# Altium PCB Atmel AVR consumer electronics control board.PcbDoc (part 3 of 4)
Units mm, origin at the board's own origin, x right, y up, seen from the top; angles counter-clockwise.
Board outline 310.13 x 89.13 mm, 2 copper layers (Top Layer, Top, Bottom Layer, Bottom); 455 components, 162 nets, 940 pads, 0 vias.
Unrouted connection lines stored in the file: 21.
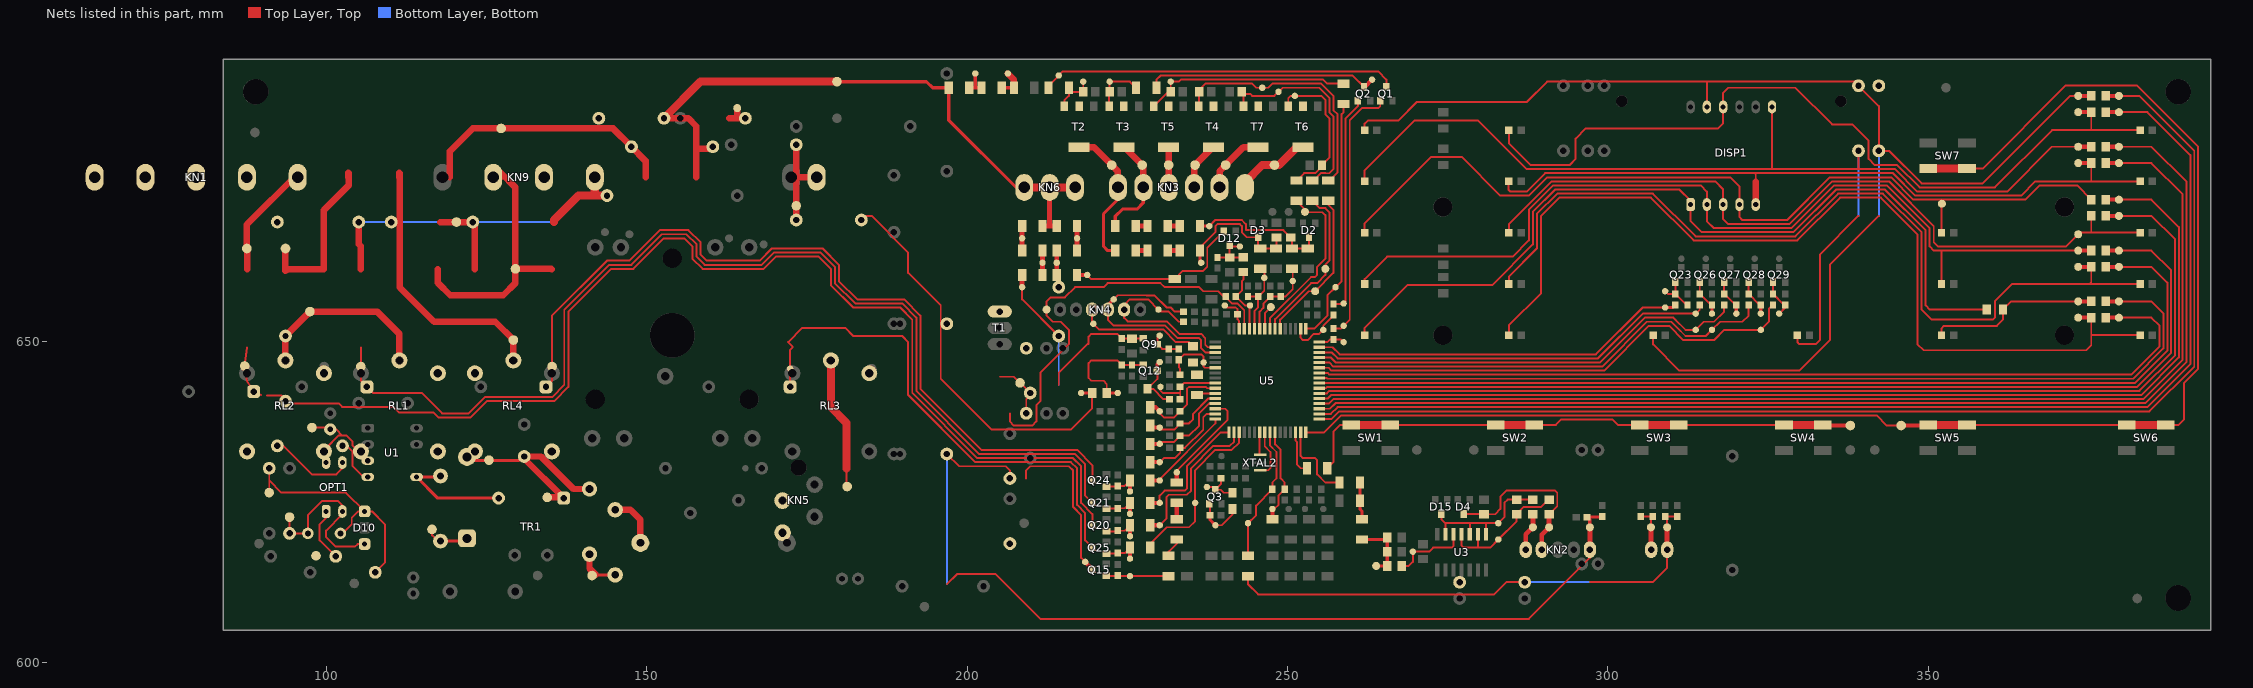
[diagram p3: the nets of this part, all layers, seen from the top]

## Nets (pads, with @x,y where several pads share a name; then routed paths per layer and width w, separated by ;. In a path a pad name is that pad's centre, name@x,y a point inside that pad or via, vN(x,y) a via of type N, cw(c..) or ccw(c..) an arc to the next point about the centre after c; other vN are vias at no path point) (continued)
BUTTON_3: C61.2 R172.1 TP46.1 U5.26 | length 15.1
  Top Layer, Top w0.292: TP46.1@247.65,623.887 247.968,623.887 248.602,624.522 248.602,626.008 C61.2@249.555,626.96 249.555,628.015 248.92,628.65 248.92,633.095 248.06,633.955 U5.26@248.06,635.823
  Top Layer, Top w0.635: R172.1@247.65,622.3 TP46.1@247.65,623.887
BUTTON_MUX0: J25.1 J25.2 SW1.1 SW1.3 SW2.1 SW2.3 SW3.1 SW3.3 SW4.1 SW4.3 TP37.1 U5.30 | length 96.2
  Top Layer, Top w0.292: U5.30@251.26,635.823 251.26,634.565 251.46,634.365 251.46,630.872 252.095,630.237 J25.1@253.047,630.237
  Top Layer, Top w0.305: J25.2@256.222,630.237 257.175,631.19 257.175,635.952 258.223,637 SW1.1@259.975,637 ; SW1.3@266.025,637 SW2.1@282.475,637 ; SW2.3@288.525,637 291.878,637 292.735,637.857 300.673,637.857 301.53,637 SW3.1@304.975,637 ; SW3.3@311.025,637 SW4.1@327.475,637
  Top Layer, Top w0.635: 332.105,637 332.2,636.905 TP37.1@337.82,636.905
  Top Layer, Top w1.27: SW1.1@259.975,637 SW1.3@266.025,637 ; SW2.1@282.475,637 SW2.3@288.525,637 ; SW3.1@304.975,637 SW3.3@311.025,637 ; SW4.1@327.475,637 332.105,637 SW4.3@333.525,637
BUTTON_MUX1: SW5.1 SW5.3 SW6.1 SW6.3 SW7.1 SW7.3 TP38.1 U5.32 | length 234.4
  Top Layer, Top w0.292: U5.32@252.86,635.823 255.712,635.823 258.382,638.492 341.947,638.492 343.535,636.905 TP38.1@345.757,636.905
  Top Layer, Top w0.3: 382.587,689.928 392.08,680.435 392.08,645.763 389.89,643.572
  Top Layer, Top w0.305: SW5.3@356.025,637 SW6.1@380.975,637 ; SW7.1@356.025,677 358.457,677 371.385,689.928 382.587,689.928 ; SW6.3@387.025,637 389.033,637 389.89,637.857 389.89,643.572
  Top Layer, Top w0.635: TP38.1@345.757,636.905 349.88,636.905 SW5.1@349.975,637
  Top Layer, Top w1.27: SW7.3@349.625,677 SW7.3@349.975,677 SW7.1@356.025,677 ; SW5.1@349.975,637 SW5.3@356.025,637 ; SW6.1@380.975,637 SW6.3@387.025,637
D/L_TRIAC_CONTROL: C10.1 C50.1 R103.2 TP109.1 U5.59 | length 11.8
  Top Layer, Top w0.292: C10.1@243.84,657.01 C50.1@245.427,657.01 246.38,657.962 TP109.1@246.38,659.956
  Top Layer, Top w0.305: U5.59@244.86,652.023 244.86,654.816 245.427,655.384 C50.1@245.427,657.01 ; R103.2@245.745,661.352 246.38,660.717 TP109.1@246.38,659.956
DOORLOCK: KN3.5 R136.1 T2.2 T2.4 TP113.1 | length 22.4
  Top Layer, Top w0.508: R136.1@223.139,664.21 221.933,664.21 221.297,664.845 221.297,669.925 223.555,672.183 KN3.5@223.555,674.053
  Top Layer, Top w1.016: T2.4@217.487,680.353 219.76,680.353 TP113.1@222.567,677.545 223.555,676.557 KN3.5@223.555,674.053
DOORLOCK_M: R1.1 TP165.1 U5.48 | length 4.2
  Top Layer, Top w0.292: U5.48@254.96,649.923 256.222,649.923 256.642,650.342 R1.1@257.175,650.342
  Top Layer, Top w0.305: R1.1@257.175,650.342 258.343,650.342 TP165.1@258.762,649.923
FLOWM_1: C48.2 R111.2 TP20.1 U5.25 | length 21.5
  Top Layer, Top w0.292: 245.11,623.252 245.11,624.42 C48.2@247.65,626.96 247.65,628.015 248.285,628.65 248.285,632.777 247.26,633.802 U5.25@247.26,635.823
  Top Layer, Top w0.305: R111.2@243.84,616.585 TP20.1@243.84,621.665 245.11,622.935 245.11,623.252
HEATER: R169.2 TP131.1 U5.19 | length 27.2
  Top Layer, Top w0.292: 231.14,621.03 234.632,621.03 235.585,621.982 TP131.1@235.585,624.84 235.585,629.92 238.76,633.095 241.3,633.095 242.46,634.255
  Top Layer, Top w0.305: R169.2@228.6,617.855 228.6,618.49 231.14,621.03 ; 242.46,634.255 U5.19@242.46,635.823
HEATER_P: KN5.a2 KN5.b2 RL3.1 TP134.1 | length 20.7
  Top Layer, Top w0.305: 181.213,630.198 181.213,627.46 TP134.1@181.292,627.38
  Top Layer, Top w1.27: RL3.1@178.752,647.065 178.752,639.762 181.213,637.302 181.213,630.198
HOT_WATER: KN3.1 T7.2 T7.4 TP140.1 | length 10.1
  Top Layer, Top w1.016: KN3.1@239.395,674.053 239.395,676.592 TP140.1@240.347,677.545 243.155,680.353 T7.4@245.427,680.353
JET_POMPASI: pad.0@243.355,674.053 T6.2 T6.4 TP7.1 | length 12.1
  Top Layer, Top w1.27: pad.0@243.355,674.053 243.355,674.837 246.062,677.545 TP7.1@247.968,677.545 248.652,677.545 251.46,680.353 T6.4@252.412,680.353
JET_PUMP/JTAG_TMS: R43.2 TP3.1 U5.56 | length 27.3
  Top Layer, Top w0.292: U5.56@247.26,652.023 247.26,653.66 253.682,660.082 254.317,660.082 254.635,660.4 254.635,661.67 255.905,662.94 255.905,669.735 255.46,670.179 252.793,670.179 TP3.1@252.73,670.242
  Top Layer, Top w0.305: R43.2@251.397,671.957 252.73,670.623 TP3.1@252.73,670.242
JTAG_TCK: TP4.1 U5.57 | length 3.7
  Top Layer, Top w0.305: U5.57@246.46,652.023 246.46,654.447 TP4.1@247.396,655.384
K_FLOWM_1: C47.2 J28.1 J28.2 KN7.1 R110.2 R111.1 TP21.1 | length 79.1
  Top Layer, Top w0.305: R111.1@243.84,613.41 243.84,612.14 245.427,610.553 282.257,610.553 284.162,612.457 J28.1@287.02,612.457 ; 297.18,612.457 307.022,612.457 309.245,614.68 KN7.1@309.245,617.538 ; TP21.1@309.245,621.03 309.245,622.402 R110.2@308.928,622.72 C47.2@310.832,622.72
  Top Layer, Top w0.762: KN7.1@309.245,617.538 TP21.1@309.245,621.03
  Bottom Layer, Bottom w0.305: J28.1@287.02,612.457 297.18,612.457
K_FLOWM_2: C53.2 KN7.2 R112.1 TP23.1 | length 7.2
  Top Layer, Top w0.305: R112.1@305.118,622.72 C53.2@307.022,622.72 306.705,622.402 TP23.1@306.705,621.03
  Top Layer, Top w0.762: TP23.1@306.705,621.03 306.745,620.99 KN7.2@306.745,617.538
K_SU_SEVIYE_1: D4.3 KN2.4 R35.1 R39.1 TP151.1 | length 27.4
  Top Layer, Top w0.292: R39.1@290.83,623.062 292.1,624.332 292.1,626.428 291.782,626.745 291.465,626.745
  Top Layer, Top w0.305: D4.3@277.495,623.105 280.713,623.105 R35.1@280.67,623.062 282.385,623.062 283.21,623.887 283.21,625.793 284.162,626.745 291.465,626.745
  Top Layer, Top w0.762: KN2.4@289.68,617.538 289.68,619.88 TP151.1@290.83,621.03 R39.1@290.83,623.062
K_SU_SEVIYE_2: KN2.5 R41.1 TP154.1 | length 6
  Top Layer, Top w0.762: KN2.5@287.18,617.538 287.18,619.92 TP154.1@288.29,621.03 R41.1@288.29,623.062
LINE_LEVEL: C34.1 R98.2 TP121.1 U5.60 | length 10.7
  Top Layer, Top w0.292: C34.1@241.935,657.01 242.887,657.962 242.887,659.447 243.103,659.663 ; 243.347,655.652 243.361,655.637
  Top Layer, Top w0.305: C34.1@241.935,657.01 241.989,657.01 243.347,655.652 ; 243.103,659.663 R98.2@243.103,660.857 ; 243.361,655.637 TP121.1@244.06,655.637 ; U5.60@244.06,652.023 TP121.1@244.06,655.637 ; TP121.1@244.157,655.637 TP121.1@244.06,655.637
MAINWASH: KN3.3 T5.2 T5.4 TP137.1 | length 6.3
  Top Layer, Top w1.016: T5.4@231.457,680.353 TP137.1@231.457,677.545 231.457,674.07 KN3.3@231.475,674.053
MOTOR_DIRECTION_1: R166.2 TP106.1 U5.16 | length 14.7
  Top Layer, Top w0.292: TP106.1@230.06,628.332 230.06,628.523 238.76,637.222 U5.16@238.76,637.923
  Top Layer, Top w0.635: R166.2@228.6,628.332 TP106.1@230.06,628.332
MOTOR_DIRECTION_2: R146.2 TP100.1 U5.17 | length 19.5
  Top Layer, Top w0.292: TP100.1@230.06,624.84 230.06,625.983 230.822,626.745 233.998,626.745 234.315,627.062 234.315,628.015
  Top Layer, Top w0.305: 234.315,628.015 234.315,630.555 239.583,635.823 U5.17@240.86,635.823
  Top Layer, Top w0.635: R146.2@228.6,624.84 TP100.1@230.06,624.84
MOTOR_PHASE_CONTROL: J9.1 J9.2 R116.2 TP80.1 U5.14 | length 19
  Top Layer, Top w0.292: TP80.1@232.727,629.602 232.727,629.856 240.665,637.794 240.665,639.127 240.27,639.523 U5.14@238.76,639.523
  Top Layer, Top w0.635: R116.2@232.727,622.3 J9.1@232.727,624.84 ; J9.2@232.727,628.015 TP80.1@232.727,629.602
MOTOR_YUKSEK_HIZ: R145.2 TP103.1 U5.18 | length 23.9
  Top Layer, Top w0.292: TP103.1@230.06,621.347 231.14,622.427 231.14,625.793 231.457,626.11 234.315,626.11 234.95,626.745
  Top Layer, Top w0.305: 234.95,626.745 234.95,630.237 238.442,633.73 240.982,633.73 241.66,634.407 U5.18@241.66,635.823
  Top Layer, Top w0.635: R145.2@228.6,621.347 TP103.1@230.06,621.347
MSUTUN_1: R31.1 TP65.1 U5.33 | length 190.9
  Top Layer, Top w0.3: 382.905,688.34 391.48,679.765 391.48,646.115 384.493,639.127
  Top Layer, Top w0.305: U5.33@254.96,637.923 256.859,637.923 258.064,639.127 384.493,639.127 ; TP65.1@379.73,688.34 382.905,688.34
  Top Layer, Top w0.635: R31.1@377.698,688.34 TP65.1@379.73,688.34
MSUTUN_2: R20.1 TP63.1 U5.35 | length 181.9
  Top Layer, Top w0.3: 383.857,640.397 390.28,646.82 390.28,674.933 384.81,680.402
  Top Layer, Top w0.305: U5.35@254.96,639.523 254.643,639.523 256.618,639.523 257.493,640.397 383.857,640.397 ; TP63.1@379.73,680.402 384.81,680.402
  Top Layer, Top w0.635: R20.1@377.698,680.402 TP63.1@379.73,680.402
MSUTUN_3: R24.1 TP61.1 U5.37 | length 170.3
  Top Layer, Top w0.3: 383.222,641.668 389.08,647.525 389.08,667.878 384.81,672.147
  Top Layer, Top w0.305: U5.37@254.96,641.122 256.312,641.122 256.858,641.668 383.222,641.668 ; TP61.1@379.73,672.147 384.81,672.147
  Top Layer, Top w0.635: R24.1@377.698,672.147 TP61.1@379.73,672.147
MSUTUN_4: R5.1 TP59.1 U5.39 | length 159.6
  Top Layer, Top w0.3: 382.587,642.938 387.88,648.23 387.88,661.14 384.81,664.21
  Top Layer, Top w0.305: U5.39@254.96,642.722 256.007,642.722 256.222,642.938 382.587,642.938 ; TP59.1@379.73,664.21 384.81,664.21
  Top Layer, Top w0.635: R5.1@377.698,664.21 TP59.1@379.73,664.21
MSUTUN_5: R36.1 TP57.1 U5.41 | length 148.9
  Top Layer, Top w0.3: 381.952,644.207 386.68,648.935 386.68,654.403 384.81,656.272
  Top Layer, Top w0.305: U5.41@254.96,644.323 256.107,644.323 256.222,644.207 381.952,644.207 ; TP57.1@379.73,656.272 384.81,656.272
  Top Layer, Top w0.635: R36.1@377.698,656.272 TP57.1@379.73,656.272
MSUTUN_6: R17.1 TP55.1 U5.34 | length 187.7
  Top Layer, Top w0.3: 384.175,639.762 390.88,646.468 390.88,679.095 384.175,685.8
  Top Layer, Top w0.305: U5.34@254.96,638.722 256.77,638.722 257.81,639.762 384.175,639.762 ; TP55.1@379.73,685.8 384.175,685.8
  Top Layer, Top w0.635: R17.1@377.698,685.8 TP55.1@379.73,685.8
MSUTUN_7: R16.1 TP53.1 U5.36 | length 178
  Top Layer, Top w0.3: 383.54,641.033 389.68,647.173 389.68,672.992 384.81,677.862
  Top Layer, Top w0.305: U5.36@254.96,640.322 254.643,640.323 256.465,640.323 257.175,641.033 383.54,641.033 ; TP53.1@379.73,677.862 384.81,677.862
  Top Layer, Top w0.635: R16.1@377.698,677.862 TP53.1@379.73,677.862
MSUTUN_8: R12.1 TP51.1 U5.38 | length 166.3
  Top Layer, Top w0.3: 382.905,642.303 388.48,647.878 388.48,665.937 384.81,669.607
  Top Layer, Top w0.305: U5.38@254.96,641.923 255.277,641.923 256.16,641.923 256.54,642.303 382.905,642.303 ; TP51.1@379.73,669.607 384.81,669.607
  Top Layer, Top w0.635: R12.1@377.698,669.607 TP51.1@379.73,669.607
MSUTUN_9: R3.1 TP49.1 U5.40 | length 155.6
  Top Layer, Top w0.3: 382.27,643.572 387.28,648.583 387.28,659.2 384.81,661.67
  Top Layer, Top w0.305: U5.40@254.96,643.523 255.855,643.523 255.905,643.572 382.27,643.572 ; TP49.1@379.73,661.67 384.81,661.67
  Top Layer, Top w0.635: R3.1@377.698,661.67 TP49.1@379.73,661.67
MSUTUN_10: R15.1 TP47.1 U5.42 | length 145.8
  Top Layer, Top w0.3: 381.635,644.842 386.08,649.288 386.08,652.462 384.81,653.732
  Top Layer, Top w0.305: U5.42@254.96,645.122 254.643,645.123 256.26,645.123 256.54,644.842 381.635,644.842 ; TP47.1@379.73,653.732 384.81,653.732
  Top Layer, Top w0.635: R15.1@377.698,653.732 TP47.1@379.73,653.732
NET00000: R127.1 R128.2 | length 1.8
  Top Layer, Top w0.762: R128.2@231.331,668.02 R127.1@233.172,668.02
NET00001: R14.2 U1.4 | length 7.3
  Top Layer, Top w0.3: R14.2@102.552,633.73 103.188,633.73 104.14,632.777 104.14,630.555 105.815,628.88 U1.4@106.5,628.88
NET00002: Q1.3 R21.2 TP119.1 | length 55.6
  Top Layer, Top w0.292: 222.567,692.15 229.87,692.15
  Top Layer, Top w0.305: R21.2@212.725,689.61 212.725,689.928 TP119.1@214.312,691.515 214.947,692.15 222.567,692.15 ; 229.87,692.15 264.16,692.15 265.43,690.88 Q1.3@265.43,689.758
NET00003: C6.1 TP164.1 U5.62 | length 5.4
  Top Layer, Top w0.292: TP164.1@240.22,655.637 240.538,655.32 241.935,655.32 242.214,655.041 C6.1@242.214,654.24 242.214,653.454 242.46,653.207 U5.62@242.46,652.023
NET00004: R19.1 R46.2 TP86.1 | length 4.1
  Top Layer, Top w1.016: 162.877,684.847 164.147,684.847 ; TP86.1@164.147,686.435 164.147,684.847 ; R19.1@165.417,684.847 164.147,684.847
NET00005: Q1.1 R1.2 TP166.1 | length 40.7
  Top Layer, Top w0.292: 259.715,654.583 259.715,684.53 261.62,686.435 264.16,686.435 264.48,686.755 Q1.1@264.48,687.557
  Top Layer, Top w0.305: R1.2@257.175,652.043 258.343,652.043 TP166.1@258.762,652.462 259.715,653.415 259.715,654.583
NET00006: R128.1 R129.2 | length 1.8
  Top Layer, Top w0.762: R129.2@226.314,668.02 R128.1@228.155,668.02
NET00007: Q9.3 R96.1 R102.1 TP115.1 | length 5.1
  Top Layer, Top w0.292: TP115.1@230.06,650.938 229.7,650.578 Q9.3@229.7,649.605 230.437,648.868 R102.1@231.457,648.868 R96.1@233.045,648.868
NET00008: R113.1 R130.2 TP124.1 | length 3.8
  Top Layer, Top w0.762: R113.1@213.995,660.4 TP124.1@213.995,662.305 R130.2@213.995,664.21
NET00009: U5.24 XTAL2.1 | length 7.7
  Top Layer, Top w0.292: XTAL2.1@245.745,629.92 247.015,629.92 247.332,630.237 247.332,632.777 246.46,633.65 U5.24@246.46,635.823
NET00010: R130.1 R131.2 TP125.1 | length 3.8
  Top Layer, Top w0.762: R130.1@217.17,664.21 TP125.1@217.17,666.115 R131.2@217.17,668.02
NET00011: U5.23 XTAL2.3 | length 3.5
  Top Layer, Top w0.292: U5.23@245.66,635.823 245.66,632.405 XTAL2.3@245.745,632.32
NET00012: C32.1 D27.2 Q12.1 R67.2 R70.1 TP97.1 | length 17.7
  Top Layer, Top w0.292: R70.1@221.805,641.985 221.805,643.382 221.297,643.89 219.392,643.89 218.963,644.32 D27.2@218.963,645.477 218.963,646.635 219.392,647.065 223.418,647.065 R67.2@224.155,646.328
  Top Layer, Top w0.305: R67.2@224.155,646.328 C32.1@225.742,646.328 227.4,646.328 Q12.1@227.5,646.428
  Top Layer, Top w0.508: R70.1@221.805,641.985 TP97.1@223.52,641.985
NET00014: D5.2 D7.1 TP11.1 | length 7.3
  Top Layer, Top w0.5: TP11.1@141.5,613.5 141.6,613.6 142.1,613.6 D7.1@145.1,613.6
  Top Layer, Top w1: D5.2@141.1,616.84 141.1,614.6 TP11.1@142.1,613.6
NET00015: R34.1 R80.1 T3.3 TP145.1 | length 8.4
  Top Layer, Top w0.292: T3.3@222.172,686.752 222.172,688.895 R80.1@222.252,688.975
  Top Layer, Top w0.305: R80.1@222.252,688.975 222.252,690.56 TP145.1@222.25,690.562 225.425,690.562 R34.1@226.377,689.61
NET00016: R124.1 R125.2 TP126.1 | length 4.5
  Top Layer, Top w0.508: R125.2@205.422,689.61 R124.1@207.327,689.61
  Top Layer, Top w1: TP126.1@206.375,691.832 207.327,690.88 R124.1@207.327,689.61
NET00017: R125.1 R126.2 TP127.1 | length 4.1
  Top Layer, Top w0.508: R126.2@200.343,689.61 201.295,689.61 ; TP127.1@201.295,691.832 201.295,689.61 ; R125.1@202.248,689.61 201.295,689.61
NET00019: R117.1 R132.2 TP117.1 | length 3.8
  Top Layer, Top w0.762: R117.1@211.772,660.4 TP117.1@211.772,662.305 R132.2@211.772,664.21
NET00020: R132.1 R133.2 TP118.1 | length 3.8
  Top Layer, Top w0.762: R132.1@208.597,664.21 TP118.1@208.597,666.115 R133.2@208.597,668.02
NET00021: R121.1 R135.2 | length 1.8
  Top Layer, Top w0.762: R135.2@231.331,664.21 R121.1@233.172,664.21
NET00022: R135.1 R136.2 | length 1.8
  Top Layer, Top w0.762: R136.2@226.314,664.21 R135.1@228.155,664.21
NET00024: R100.1 R115.1 T1.3 TP84.1 | length 9.3
  Top Layer, Top w0.292: 205.105,644.525 207.327,644.525 TP84.1@208.28,643.572 R100.1@209.867,641.985 209.867,641.668 209.232,641.033 R115.1@209.232,638.81
NET00025: R21.1 R50.1 T2.3 TP120.1 | length 7
  Top Layer, Top w0.292: TP120.1@218.123,690.562 218.125,690.56 R50.1@218.125,688.975
  Top Layer, Top w0.305: T2.3@215.187,686.752 215.187,687.627 215.9,688.34 R21.1@215.9,688.975 ; R21.1@215.9,689.61 R21.1@215.9,688.975 ; R50.1@218.125,688.975 R21.1@215.9,688.975
NET00027: D12.2 R113.2 R137.2 TP123.1 | length 28
  Top Layer, Top w0.292: R137.2@232.41,659.765 233.68,661.035 236.855,661.035 237.49,661.67 237.49,664.673 D12.2@240.032,667.215
  Top Layer, Top w0.305: TP123.1@218.757,660.4 219.392,659.765 R137.2@232.41,659.765
  Top Layer, Top w0.635: R113.2@217.17,660.4 TP123.1@218.757,660.4
NET00028: D31.1 Q20.3 RL2.2 TP105.1 | length 190.8
  Top Layer, Top w0.305: 87.662,649.065 87.63,649.032 TP105.1@87.3,646.2 87.63,643.89 D31.1@88.7,642.2 89.852,641.668 ; 90.772,641.571 93.02,641.566 94.902,640.366 101.949,640.366 102.505,639.81 110.5,639.81 111.405,638.905 116.77,638.905 117.5,638.175 122.555,638.175 125.095,640.715 135.572,640.715 137.795,642.938 137.795,654.685 144.463,661.352 147.955,661.352 152.718,666.115 155.892,666.115 157.162,664.845 157.162,662.94 158.75,661.352 168.275,661.352 170.18,663.257 176.847,663.257 178.752,661.352 178.752,658.812 182.245,655.32 189.547,655.32 191.452,653.415 191.452,641.985 201.612,631.825 216.535,631.825 217.805,630.555 217.805,624.84 219.562,623.083 Q20.3@219.562,621.347
NET00029: D6.2 TR1.2 U1.5 | length 17.9
  Top Layer, Top w0.5: D6.2@117.856,629.031 117.705,628.88 U1.5@114.12,628.88 117.416,625.584 TR1.2@126.906,625.584
NET00030: Q2.1 R2.2 TP148.1 | length 34.2
  Top Layer, Top w0.292: R2.2@257.175,655.853 258.66,655.853 TP148.1@258.762,655.955 259.08,656.272 259.08,684.847 260.987,686.755 Q2.1@260.987,687.557
NET00031: Q26.1 R149.2 R171.1 TP70.1 | length 5.8
  Top Layer, Top w0.305: Q26.1@314.327,659.3 314.327,657.44 R171.1@314.325,657.44 316.025,655.74 R149.2@316.23,655.74
  Top Layer, Top w0.508: TP70.1@316.23,654.367 R149.2@316.23,655.74
NET00032: D2.3 R66.2 R82.1 R97.1 R127.2 TP149.1 | length 22.5
  Top Layer, Top w0.292: 238.76,668.972 242.887,668.972 243.522,668.337 243.522,667.385 249.364,667.385 R66.2@250.507,666.242
  Top Layer, Top w0.305: TP149.1@237.807,668.02 238.76,668.972 ; R66.2@250.507,666.242 250.698,666.051 R97.1@250.698,664.527 R82.1@253.174,664.527 253.365,664.527 D2.3@253.365,666.285
  Top Layer, Top w0.508: R127.2@236.347,668.02 TP149.1@237.807,668.02
NET00033: Q2.3 R34.2 TP160.1 | length 36.4
  Top Layer, Top w0.292: 230.188,691.515 260.032,691.515
  Top Layer, Top w0.305: R34.2@229.552,689.61 229.552,690.88 230.188,691.515 ; 260.032,691.515 260.18,691.515 Q2.3@261.938,689.758
  Top Layer, Top w0.635: Q2.3@261.938,689.758 262.085,689.758 TP160.1@263.207,690.88
NET00034: C35.1 D12.3 R98.1 R101.2 TP122.1 | length 7.5
  Top Layer, Top w0.305: R101.2@239.077,663.155 C35.1@240.982,663.155 ; D12.3@240.982,665.015 D12.3@240.982,664.845 ; TP122.1@242.57,664.845 D12.3@240.982,664.845 ; R98.1@243.103,663.143 243.103,663.13 C35.1@240.982,663.13 C35.1@240.982,663.155 ; C35.1@240.982,663.155 D12.3@240.982,664.845
NET00035: Q15.3 R115.2 TP83.1 | length 27.6
  Top Layer, Top w0.292: TP83.1@218.44,615.632 218.44,615.498 Q15.3@219.537,614.401
  Top Layer, Top w0.305: 209.232,628.65 209.232,629.92 209.867,630.555 215.9,630.555 216.535,629.92 216.535,624.205 217.805,622.935 217.805,616.267 TP83.1@218.44,615.632
  Top Layer, Top w0.635: TP83.1@218.44,615.632 219.562,614.51 219.537,614.485 Q15.3@219.537,614.401
NET00036: C11.1 D10.1 R6.2 R7.1 TP168.1 | length 38.3
  Top Layer, Top w0.3: TP168.1@91.123,626.428 91.123,628.332 ; R7.1@91.123,630.237 91.123,628.332 ; C11.1@102.5,620 104,621.5 104,622.5 105,623.5 D10.1@106,623.5 ; R6.2@107.66,614 109.16,615.5 109.16,621.5 107.16,623.5 D10.1@106,623.5 ; 91.123,628.332 93.027,626.428 103.072,626.428 D10.1@106,623.5
NET00037: C2.2 D5.1 D8.2 TP22.1 TP81.1 TR1.1 | length 34
  Top Layer, Top w0.3: TP81.1@124.777,631.444 124.841,631.507 TP81.1@125.412,631.507
  Top Layer, Top w0.5: D8.2@121.983,632.015 122.555,631.444 124.777,631.444 130.112,631.444 130.738,632.07 C2.2@130.909,632.07 C2.2@130.779,632.2
  Top Layer, Top w1: TP22.1@134.5,625.7 TR1.1@136.95,625.7 ; TR1.1@137.066,625.584 TR1.1@136.95,625.7 ; D5.1@141.1,627 138.6,627 133.53,632.07 C2.2@130.909,632.07 130.909,631.741 TR1.1@136.95,625.7
NET00038: J44.1 J44.2 Q15.1 R116.1 R134.1 TP82.1 | length 12.9
  Top Layer, Top w0.292: Q15.1@221.737,613.451 223.458,613.451 R134.1@223.52,613.512
  Top Layer, Top w0.305: R134.1@223.52,613.512 223.622,613.41 TP82.1@225.425,613.41 J44.1@231.457,613.41 ; J44.2@231.457,616.585 231.457,617.22 232.727,618.49 R116.1@232.727,619.125
NET00039: Q27.1 R150.2 R173.1 TP72.1 | length 5.8
  Top Layer, Top w0.305: Q27.1@318.137,659.3 318.137,657.44 R173.1@318.135,657.44 319.835,655.74 R150.2@320.04,655.74
  Top Layer, Top w0.508: TP72.1@320.04,654.367 R150.2@320.04,655.74
NET00040: Q3.3 R10.1 R55.1 TP159.1 | length 6.5
  Top Layer, Top w0.292: R55.1@239.61,628.65 239.61,627.743 Q3.3@238.76,626.893 239.565,626.893 240.03,626.428 R10.1@241.427,626.428
  Top Layer, Top w0.305: TP159.1@237.427,627.317 238.336,627.317 Q3.3@238.76,626.893
NET00041: D6.1 D8.1 TP24.1 | length 7
  Top Layer, Top w0.3: TP24.1@116.522,620.712 116.522,619.76 117.411,618.871 D6.1@117.856,618.871
  Top Layer, Top w0.5: D6.1@117.856,618.871 121.539,618.871 D8.1@121.983,619.315
NET00043: Q21.1 R146.1 R165.2 TP101.1 | length 5.8
  Top Layer, Top w0.292: R165.2@223.52,623.99 224.575,623.99 R146.1@225.425,624.84
  Top Layer, Top w0.305: Q21.1@221.763,623.89 221.863,623.99 R165.2@223.52,623.99
  Top Layer, Top w0.635: TP101.1@225.425,623.125 R146.1@225.425,624.84
NET00045: D33.1 Q21.3 RL1.2 TP102.1 | length 171
  Top Layer, Top w0.305: 105.442,649.065 105.442,646.145 TP102.1@105.41,646.112 105.41,643.89 D33.1@106.362,642.938 107.315,641.985 114.935,641.985 118.11,638.81 122.237,638.81 124.777,641.35 135.255,641.35 137.16,643.255 137.16,655.002 144.145,661.987 147.637,661.987 152.4,666.75 156.21,666.75 157.797,665.163 157.797,663.257 159.067,661.987 167.957,661.987 169.862,663.892 177.165,663.892 179.387,661.67 179.387,659.13 182.562,655.955 189.865,655.955 192.088,653.732 192.088,642.303 201.93,632.46 216.852,632.46 218.44,630.872 218.44,625.962 Q21.3@219.562,624.84
NET00046: R43.1 R86.1 T6.3 TP142.1 | length 23.4
  Top Layer, Top w0.292: T6.3@250.112,686.752 250.112,687.945 250.507,688.34 TP142.1@251.142,688.34 251.7,688.34 ; 255.905,685.482 256.54,684.847 256.54,678.688
  Top Layer, Top w0.305: R43.1@251.397,675.132 251.46,675.132 252.603,676.275 254.317,676.275 255.395,677.352 R86.1@255.395,677.545 256.538,678.688 256.54,678.688 ; 251.7,688.34 255.27,688.34 255.905,687.705 255.905,685.482
NET00047: D15.3 R38.1 R41.2 TP153.1 U3.8 U3.10 U3.13 | length 23.3
  Top Layer, Top w0.305: D15.3@274.002,623.105 274.002,622.3 274.637,621.665 ; U3.13@274.637,619.95 274.637,621.665 ; U3.10@278.447,619.95 278.447,621.665 ; U3.8@280.988,619.95 280.988,621.665 ; R41.2@288.29,625.348 R38.1@285.75,625.348 284.353,625.348 283.845,624.84 283.845,622.617 TP153.1@282.892,621.665 280.988,621.665 ; 274.637,621.665 278.447,621.665 ; 278.447,621.665 280.988,621.665
NET00048: R42.1 TP155.1 U3.12 | length 12.1
  Top Layer, Top w0.292: R42.1@267.843,614.997 268.923,614.997 269.558,615.632 TP155.1@269.558,617.22
  Top Layer, Top w0.305: TP155.1@269.558,617.22 272.097,617.22 272.733,617.855 275.59,617.855 275.907,618.173 U3.12@275.907,619.95
NET00049: Q28.1 R151.2 R175.1 TP74.1 | length 5.8
  Top Layer, Top w0.305: Q28.1@321.947,659.3 321.947,657.44 R175.1@321.945,657.44 323.645,655.74 R151.2@323.85,655.74
  Top Layer, Top w0.508: TP74.1@323.85,654.367 R151.2@323.85,655.74
NET00050: R73.2 R74.1 T5.3 TP136.1 | length 32.5
  Top Layer, Top w0.292: T5.3@229.157,686.752 231.38,688.975 R74.1@231.777,688.975 231.777,690.56 TP136.1@231.775,690.562 233.045,690.562 233.362,690.88 255.587,690.88 256.222,690.245 R73.2@258.762,690.245
NET00052: Q24.1 R166.1 R167.2 TP107.1 | length 5.8
  Top Layer, Top w0.305: Q24.1@221.763,627.382 223.42,627.382 R167.2@223.52,627.482 224.575,627.482 R166.1@225.425,628.332
  Top Layer, Top w0.635: TP107.1@225.425,626.618 R166.1@225.425,628.332
NET00053: Q3.1 R8.2 R11.1 TP158.1 | length 7.9
  Top Layer, Top w0.292: Q3.1@237.81,624.692 237.91,624.592 R11.1@237.91,622.935 ; TP158.1@238.76,621.347 239.712,621.347 241.427,623.062 R8.2@241.427,623.887
  Top Layer, Top w0.508: R11.1@237.91,622.935 237.91,622.198 TP158.1@238.76,621.347
NET00054: OPT1.3 R14.1 | length 13.5
  Top Layer, Top w0.3: R14.1@92.392,633.73 93.345,633.73 97.79,629.285 101.6,629.285 102.54,630.225 OPT1.3@102.54,631.12
  Top Layer, Top w0.5: OPT1.3@102.54,631.12 OPT1.3@102.749,631.12
NET00055: R38.2 R39.2 TP152.1 U3.9 U3.11 | length 21.4
  Top Layer, Top w0.305: U3.11@277.178,619.95 277.178,618.173 277.495,617.855 279.717,617.855 ; U3.9@279.717,619.95 279.717,617.855 ; R39.2@290.83,625.348 290.703,625.348 289.56,624.205 286.893,624.205 R38.2@285.75,623.062 285.75,621.982 TP152.1@282.892,619.125 281.623,617.855 279.717,617.855
NET00056: JM3.1 RL1.1 RL2.1 TP90.1 | length 28.7
  Top Layer, Top w1.016: RL2.1@93.662,647.065 JM3.1@93.662,650.875 TP90.1@97.472,654.685 107.95,654.685 111.442,651.192 RL1.1@111.442,647.065
NET00059: C1.2 OPT1.4 TP111.1 U1.3 | length 16.8
  Top Layer, Top w0.3: TP111.1@97.79,636.587 100.37,636.587 C1.2@100.647,636.31 101.56,636.31 102.552,635.317 ; OPT1.4@100,631.12 100,632 100,633.4 101.917,635.317 102.552,635.317 ; 104.14,634.365 103.188,635.317 102.552,635.317
  Top Layer, Top w0.305: 104.14,634.365 104.14,633.78 U1.3@106.5,631.42
NET00063: Q29.1 R177.1 R179.2 TP76.1 | length 6.2
  Top Layer, Top w0.305: Q29.1@325.757,659.3 325.757,657.44 R177.1@325.755,657.44 327.455,655.74 R179.2@327.66,655.74 327.66,655.32 TP76.1@326.707,654.367
NET00064: C11.2 D10.3 OPT1.2 R9.1 TP167.1 | length 27.7
  Top Layer, Top w0.3: TP167.1@94.297,622.617 R9.1@94.297,620.077 C11.2@97.155,620.077 ; OPT1.2@102.54,624.46 OPT1.2@102.54,623.5 102.54,623.04 100,620.5 100,619.5 101.5,618 104.5,618 104.92,618.42 D10.3@106,618.42
  Top Layer, Top w0.305: C11.2@97.155,620.077 97.155,622.935 99.377,625.158 101.842,625.158 OPT1.2@102.54,624.46
NET00066: D35.1 Q24.3 RL4.5 TP108.1 | length 129.8
  Top Layer, Top w0.305: D35.1@134.302,642.938 135.223,643.858 TP108.1@135.223,646.112 ; TP108.1@135.255,646.112 TP108.1@135.223,646.112 ; Q24.3@219.562,628.332 219.562,630.703 217.17,633.095 202.248,633.095 192.722,642.62 192.722,654.05 190.183,656.59 182.88,656.59 180.022,659.447 180.022,661.987 177.482,664.527 169.545,664.527 167.64,662.622 159.385,662.622 158.433,663.575 158.433,665.48 156.528,667.385 152.082,667.385 147.32,662.622 143.827,662.622 135.223,654.018 TP108.1@135.223,646.112
NET00070: Q12.3 R53.1 R56.1 TP96.1 | length 9
  Top Layer, Top w0.292: 228.917,642.62 R56.1@228.155,642.62 229.7,644.165 Q12.3@229.7,645.477
  Top Layer, Top w0.305: 228.917,642.62 229.044,642.62 230.632,641.033 R53.1@231.56,641.033
  Top Layer, Top w0.508: Q12.3@229.7,645.477 229.7,646.451 TP96.1@230.06,646.811
NET00071: D7.2 R23.2 | length 8.2
  Top Layer, Top w1: D7.2@145.1,623.76 147.48,623.76 149.04,622.2 R23.2@149.04,618.6
NET00072: OPT1.1 R4.1 TP144.1 | length 8.4
  Top Layer, Top w0.3: OPT1.1@100,623.5 100,622.5 99,621.5 99,619 R4.1@101.5,616.5
NET00074: R68.1 R70.2 TP98.1 | length 64.3
  Top Layer, Top w0.305: R68.1@183.515,668.972 183.515,669.29 183.832,669.607 185.102,669.607 190.817,663.892 190.817,660.717 195.897,655.637 195.897,644.207 203.835,636.27 216.218,636.27 219.519,639.572 R70.2@219.519,641.985
  Top Layer, Top w0.508: TP98.1@217.805,641.985 R70.2@219.519,641.985
NET00076: R81.1 R91.2 T7.3 TP139.1 | length 32.5
  Top Layer, Top w0.292: R81.1@242.885,688.975 R81.1@243.127,688.733 ; T7.3@243.127,686.752 R81.1@243.127,688.733 ; 255.905,676.275 256.54,676.275 257.175,676.91 257.175,685.165 256.54,685.8 256.54,688.022 254.952,689.61 249.237,689.61 TP139.1@248.602,688.975 247.968,688.34 244.475,688.34 244.157,688.658 243.203,688.658 R81.1@243.127,688.733
  Top Layer, Top w0.305: R91.2@253.873,675.132 254.063,675.132 255.206,676.275 255.905,676.275
NET00077: C33.1 D9.1 J37.1 J37.2 Q9.1 R117.2 R120.1 TP116.1 | length 38.2
  Top Layer, Top w0.292: 214.312,643.255 214.312,645.16 218.757,649.605 ; 219.392,651.192 223.418,651.192
  Top Layer, Top w0.305: TP116.1@208.597,658.495 208.597,656.59 J37.1@214.312,650.875 ; 218.757,649.605 D9.1@218.963,649.605 218.963,650.763 219.392,651.192 ; 223.418,651.192 C33.1@224.155,650.455 R120.1@225.742,650.455 ; R120.1@225.742,650.43 R120.1@225.742,650.455 ; Q9.1@227.5,650.555 227.5,650.455 R120.1@225.742,650.455
  Top Layer, Top w0.762: TP116.1@208.597,658.495 R117.2@208.597,660.4
  Bottom Layer, Bottom w0.305: 214.312,643.255 J37.1@214.312,650.875
NET00082: R61.2 R62.1 T4.3 TP129.1 | length 39.4
  Top Layer, Top w0.292: T4.3@236.142,686.752 236.222,686.832 R62.1@236.222,688.975 236.222,689.295 237.172,690.245 244.475,690.245 245.11,689.61 TP129.1@246.062,689.61 247.015,689.61 247.65,690.245 255.27,690.245
  Top Layer, Top w0.305: 255.27,690.245 257.175,688.34 257.175,686.117 257.81,685.482 257.81,676.402 256.54,675.132 R61.2@256.349,675.132
NET00092: D3.3 R84.2 R85.1 R103.1 R121.2 TP110.1 | length 21.3
  Top Layer, Top w0.292: R121.2@236.347,664.21 236.347,664.654 238.76,667.067 238.76,668.02 239.077,668.337 242.57,668.337 242.887,668.02 242.887,667.067 243.205,666.75
  Top Layer, Top w0.305: 243.205,666.75 243.67,666.285 D3.3@245.427,666.285 245.427,664.527 R103.1@245.745,664.527 R85.1@248.221,664.527 248.285,664.527 R84.2@248.285,666.242
  Top Layer, Top w0.508: R121.2@236.347,664.21 236.347,662.495 TP110.1@236.537,662.305
NET00095: Q25.1 R168.2 R169.1 TP132.1 | length 5.8
  Top Layer, Top w0.292: R168.2@223.52,617.005 224.575,617.005 R169.1@225.425,617.855
  Top Layer, Top w0.305: Q25.1@221.763,616.905 223.42,616.905 R168.2@223.52,617.005
  Top Layer, Top w0.635: TP132.1@225.425,616.14 R169.1@225.425,617.855
NET00096: D34.1 Q25.3 RL3.2 TP133.1 | length 80.7
  Top Layer, Top w0.305: D34.1@172.403,642.938 TP133.1@172.403,645.795 172.403,648.715 172.752,649.065 172.752,649.255 172.085,649.923 174.308,652.145 180.975,652.145 182.245,650.875 189.865,650.875 190.817,649.923 190.817,641.668 201.295,631.19 216.218,631.19 217.17,630.237 217.17,624.522 218.44,623.252 218.44,618.977 Q25.3@219.562,617.855
NET00122: Q23.1 R148.2 R152.1 TP68.1 | length 6.2
  Top Layer, Top w0.292: TP68.1@308.928,657.86 309.347,657.44 R152.1@310.515,657.44 310.517,657.443 Q23.1@310.517,659.3
  Top Layer, Top w0.305: R152.1@310.515,657.44 312.215,655.74 R148.2@312.42,655.74
NET00126: Q20.1 R144.2 R145.1 TP104.1 | length 5.8
  Top Layer, Top w0.292: R144.2@223.52,620.497 224.575,620.497 R145.1@225.425,621.347
  Top Layer, Top w0.305: Q20.1@221.763,620.397 223.42,620.397 R144.2@223.52,620.497
  Top Layer, Top w0.635: TP104.1@225.425,619.633 R145.1@225.425,621.347
NTC: C15.2 R27.2 TP26.1 U5.61 | length 65.7
  Top Layer, Top w0.292: 210.82,640.08 211.455,640.715 211.455,645.16 215.9,649.605 215.9,651.827 214.63,653.097 213.36,653.097 212.407,654.05 TP26.1@212.407,655.002 212.407,656.272 213.042,656.908 215.265,656.908 216.852,658.495 ; 221.933,659.13 230.188,659.13 230.822,658.495 236.22,658.495 236.855,657.86 239.204,657.86 ; C15.2@240.347,657.01 240.347,656.908 241.3,655.955 242.189,655.955 243.26,654.884 U5.61@243.26,652.023
  Top Layer, Top w0.305: 206.692,638.81 206.692,637.54 207.327,636.905 210.185,636.905 210.82,637.54 210.82,640.08 ; 216.852,658.495 221.297,658.495 221.933,659.13 ; 239.204,657.86 240.055,657.01 C15.2@240.347,657.01
NTC_K1: C13.1 J20.1 J20.2 KN2.1 R26.1 R27.1 TP25.1 | length 149.2
  Top Layer, Top w0.305: 196.85,612.14 198.438,613.727 204.47,613.727 211.455,606.742 287.655,606.742 297.18,616.267 KN2.1@297.18,617.538 ; J20.1@196.85,632.46 198.755,630.555 206.058,630.555 206.692,629.92 R27.1@206.692,628.65
  Top Layer, Top w0.508: TP25.1@297.18,621.03 297.18,622.198 C13.1@296.76,622.617 298.983,622.617 R26.1@299.085,622.72
  Top Layer, Top w0.762: KN2.1@297.18,617.538 TP25.1@297.18,621.03
  Bottom Layer, Bottom w0.305: 196.85,612.14 J20.1@196.85,632.46
P: J53.1 J53.2 J55.1 J55.2 JM1.2 KN9.1 RL1.3 RL4.3 TP88.1 | length 58.7
  Top Layer, Top w1.016: J53.1@105.093,668.655 105.093,665.195 105.442,664.845 105.442,661.265 ; 117.792,668.655 TP88.1@120.332,668.655 J55.1@122.872,668.655 123.19,668.655 123.222,668.623 123.222,661.265
  Top Layer, Top w1.27: 135.572,668.655 135.572,668.972 139.382,672.783 141.922,672.783 ; KN9.1@141.922,675.64 141.922,672.783 ; JM1.2@143.827,672.783 141.922,672.783
  Bottom Layer, Bottom w0.305: J53.1@105.093,668.655 J55.2@110.172,668.655 117.792,668.655 ; J55.1@122.872,668.655 135.572,668.655
PHASE: JM2.1 KN6.1 KN6.2 KN6.3 KN9.3 R46.1 R126.1 R131.1 R133.1 TP87.1 | length 100.9
  Top Layer, Top w0.508: TP87.1@179.705,690.562 193.675,690.562 194.627,689.61 R126.1@197.167,689.61 197.167,684.53 207.645,674.053 KN6.3@208.933,674.053
  Top Layer, Top w0.762: R133.1@211.772,668.02 213.042,668.02 ; KN6.2@212.893,674.053 212.893,668.17 213.042,668.02 ; R131.1@213.995,668.02 213.042,668.02
  Top Layer, Top w1.016: R46.1@152.718,684.847 156.528,684.847 157.762,683.613 157.762,680.085 ; 157.762,675.64 157.762,680.085 ; JM2.1@160.338,680.402 160.02,680.085 157.762,680.085
  Top Layer, Top w1.27: R46.1@152.718,684.847 158.433,690.562 TP87.1@179.705,690.562 ; KN6.3@208.933,674.053 KN6.2@212.893,674.053 KN6.1@216.852,674.053
PREWASH: KN3.2 T4.2 T4.4 TP130.1 | length 7.6
  Top Layer, Top w1.016: KN3.2@235.435,674.053 235.435,677.395 TP130.1@235.585,677.545 238.393,680.353 T4.4@238.442,680.353
PUMP: R2.1 TP147.1 U5.50 | length 8.7
  Top Layer, Top w0.292: U5.50@252.06,652.023 252.06,650.593 252.412,650.24 253.174,650.24 254.127,651.192 254.952,651.192 TP147.1@255.587,651.827 255.587,652.462 257.175,654.05 R2.1@257.175,654.152
PUMP_CONTROL: C8.1 C49.1 R97.2 TP150.1 U5.58 | length 12.9
  Top Layer, Top w0.292: 246.253,655.637 246.253,655.93 C8.1@247.332,657.01 C49.1@248.92,657.01 249.657,657.01 250.825,658.178 TP150.1@250.825,659.447
  Top Layer, Top w0.305: U5.58@245.66,652.023 245.66,654.663 246.253,655.256 246.253,655.637 ; R97.2@250.698,661.352 250.825,661.226 TP150.1@250.825,659.447
ROTARY_1: C54.2 R109.2 TP28.1 U5.10 | length 14.5
  Top Layer, Top w0.292: TP28.1@230.06,639.127 230.06,638.81 230.695,638.175 232.308,638.175 C54.2@233.26,639.127 234.315,640.182 234.315,642.62 234.632,642.938 237.275,642.938 237.49,642.722 U5.10@238.76,642.722
  Top Layer, Top w0.635: R109.2@228.6,639.762 229.425,639.762 TP28.1@230.06,639.127
ROTARY_2: C57.2 R158.2 TP32.1 U5.12 | length 13
  Top Layer, Top w0.292: TP32.1@230.06,636.587 230.378,636.27 232.308,636.27 C57.2@233.26,637.222
  Top Layer, Top w0.305: C57.2@233.26,637.222 234.632,637.222 235.267,637.857 235.267,638.746 237.643,641.122 U5.12@238.76,641.122
  Top Layer, Top w0.635: R158.2@228.6,636.905 228.917,636.587 TP32.1@230.06,636.587
ROTARY_3: C60.2 R164.2 TP30.1 U5.13 | length 13.9
  Top Layer, Top w0.292: TP30.1@230.06,634.048 230.378,634.365 232.308,634.365 C60.2@233.26,635.317
  Top Layer, Top w0.305: C60.2@233.26,635.317 234.632,635.317 236.22,636.905 236.22,638.81 237.732,640.322 U5.13@238.76,640.322
  Top Layer, Top w0.635: R164.2@228.6,634.048 TP30.1@230.06,634.048
ROTARY_4: C58.2 R160.2 TP34.1 U5.15 | length 14.8
  Top Layer, Top w0.292: TP34.1@230.06,631.19 230.695,631.825 232.41,631.825 233.26,632.675 C58.2@233.26,633.413
  Top Layer, Top w0.305: C58.2@233.26,633.413 233.998,633.413 236.855,636.27 236.855,638.175 237.402,638.722 U5.15@238.76,638.722
  Top Layer, Top w0.635: R160.2@228.6,631.19 TP34.1@230.06,631.19
ROTOR: KN1.5 RL1.4 RL4.4 TP89.1 | length 40.4
  Top Layer, Top w1.016: 117.443,661.265 117.443,659.162 119.38,657.225 127.635,657.225 129.54,659.13 TP89.1@129.54,661.352 ; 127.248,675.64 127.248,676.345 129.54,674.053 TP89.1@129.54,661.352 ; 135.223,661.265 135.135,661.352 TP89.1@129.54,661.352
RX: KN4.2 R18.2 TP162.1 U5.2 | length 29.8
  Top Layer, Top w0.292: 233.362,651.192 233.108,651.192 231.14,653.161 225.044,653.161 224.512,653.693 KN4.2@224.512,655.002 224.512,655.677 225.425,656.59 228.282,656.59 TP162.1@229.87,655.002 230.188,654.685 231.457,654.685 233.045,653.097 R18.2@233.782,653.097
  Top Layer, Top w0.305: 233.362,651.192 236.537,651.192 237.172,650.558 237.172,649.523 237.572,649.122 U5.2@238.76,649.122
SATIR_0: R152.2 TP67.1 U5.47 | length 59.2
  Top Layer, Top w0.305: U5.47@254.96,649.122 257.023,649.122 258.127,648.017 298.132,648.017 305.435,655.32 TP67.1@308.928,655.32
  Top Layer, Top w0.508: TP67.1@308.928,655.32 310.095,655.32 R152.2@310.515,655.74
SATIR_1: R171.2 TP69.1 U5.46 | length 63.6
  Top Layer, Top w0.292: 305.435,654.367 TP69.1@313.69,654.367 314.325,655.002 R171.2@314.325,655.74
  Top Layer, Top w0.305: U5.46@254.96,648.323 256.87,648.323 257.81,647.382 298.45,647.382 305.435,654.368
SATIR_2: R173.2 TP71.1 U5.45 | length 69.4
  Top Layer, Top w0.292: 310.515,653.415 312.102,651.827 TP71.1@313.69,651.827 314.96,653.097 316.548,653.097 318.135,654.685 R173.2@318.135,655.74
  Top Layer, Top w0.305: U5.45@254.96,647.522 256.718,647.522 257.493,646.747 298.767,646.747 305.753,653.733 310.197,653.732 310.515,653.415
SATIR_3: R175.2 TP73.1 U5.44 | length 74.1
  Top Layer, Top w0.292: 310.515,652.462 310.832,652.145 312.102,650.875 315.277,650.875
  Top Layer, Top w0.305: U5.44@254.96,646.722 256.565,646.723 257.175,646.112 299.085,646.112 306.07,653.098 309.88,653.098 310.515,652.462 ; 315.277,650.875 TP73.1@316.23,651.827 317.5,653.097 320.993,653.097 321.945,654.05 R175.2@321.945,655.74
SATIR_4: R177.2 TP75.1 U5.43 | length 78.2
  Top Layer, Top w0.305: U5.43@254.96,645.923 256.412,645.923 256.858,645.477 299.402,645.477 306.387,652.462 309.562,652.462 311.785,650.24 316.548,650.24 318.135,651.827 TP75.1@323.85,651.827 325.12,653.097 325.12,655.105 R177.2@325.755,655.74
SCK: J16.1 J16.2 J33.1 J33.2 KN4.4 TP138.1 U5.11 | length 22.3
  Top Layer, Top w0.305: KN4.4@219.512,655.002 219.512,652.978 TP138.1@219.71,652.78 220.567,651.923 220.687,651.923 230.6,651.923 232.6,649.923 234.632,649.923 J33.1@235.267,649.288 ; J16.2@235.903,641.668 236.158,641.923 U5.11@238.76,641.923
STATOR_COM: KN1.3 RL4.1 TP93.1 | length 43
  Top Layer, Top w1.016: 111.407,675.64 111.407,676.345 111.478,676.275 111.478,658.46 116.84,653.097 126.403,653.097 129.222,650.278 TP93.1@129.222,650.24 RL4.1@129.222,647.065
STATOR_HIGH_SPEED: KN1.1 RL2.3 TP91.1 | length 19.1
  Top Layer, Top w1.016: 87.662,661.265 87.662,664.495 TP91.1@87.63,664.527 87.63,668.268 KN1.1@95.567,676.205 ; KN1.1@95.567,675.64 KN1.1@95.567,676.205 ; KN1.1@95.567,676.205 95.567,676.345 95.637,676.275 KN1.1@95.567,676.205
STATOR_LOW_SPEED: JM3.2 KN1.2 RL2.4 TP92.1 | length 27
  Top Layer, Top w1.016: TP92.1@93.662,664.527 93.662,661.035 93.892,661.265 99.663,661.265 99.663,670.528 103.557,674.422 103.557,676.275 103.487,676.345 103.487,675.64
SUTUN_1: DISP1.11 J13.1 J13.2 LD1.1 LD11.1 R31.2 TP66.1 | length 202.9
  Top Layer, Top w0.305: LD1.1@261.95,683 LD1.1@262.05,683 262.05,684.007 262.572,684.53 267.335,684.53 270.192,687.387 287.337,687.387 290.512,690.562 315.44,690.562 ; LD11.1@306.95,651 LD11.1@307.05,651 307.05,649.577 311.15,645.477 329.882,645.477 334.645,650.24 334.645,661.987 342.265,669.607 ; DISP1.11@315.44,686.62 315.44,690.562 ; TP66.1@373.38,688.34 372.11,688.34 358.457,674.688 348.933,674.688 343.852,679.767 J13.1@342.265,679.767 342.265,686.752 338.455,690.562 315.44,690.562
  Top Layer, Top w0.635: TP66.1@373.38,688.34 R31.2@375.412,688.34
  Bottom Layer, Bottom w0.305: 342.265,669.607 J13.1@342.265,679.767
SUTUN_2: DISP1.7 J12.1 J12.2 LD2.1 LD12.1 R20.2 TP64.1 | length 175.6
  Top Layer, Top w0.305: LD2.1@261.95,675 LD2.1@262.05,675 262.05,676.705 269.875,684.53 279.717,684.53 287.337,676.91 325.6,676.91 ; DISP1.7@325.6,686.62 325.6,676.91 ; LD12.1@329.45,651 LD12.1@329.55,651 329.55,649.938 329.882,649.605 332.423,649.605 333.058,650.24 333.058,663.575 339.09,669.607 ; J12.1@339.09,679.767 339.09,676.91 ; TP64.1@373.38,680.402 369.252,680.402 362.267,673.418 348.297,673.418 344.805,676.91 339.09,676.91 ; 325.6,676.91 339.09,676.91
  Top Layer, Top w0.635: TP64.1@373.38,680.402 R20.2@375.412,680.402
  Bottom Layer, Bottom w0.305: 339.09,669.607 J12.1@339.09,679.767
SUTUN_3: DISP1.4 LD3.1 LD13.1 R24.2 TP62.1 | length 139.8
  Top Layer, Top w0.305: LD3.1@261.95,667 LD3.1@262.05,667 262.05,668.45 272.415,678.815 277.178,678.815 283.21,672.783 287.655,672.783 290.512,675.64 319.087,675.64 320.52,674.208 DISP1.4@320.52,671.38 320.52,669.445 320.993,668.972 327.977,668.972 334.645,675.64 344.17,675.64 347.662,672.147 352.107,672.147 ; LD13.1@351.95,667 LD13.1@352.05,667 352.05,671.512 TP62.1@352.107,671.512 352.107,672.032 352.05,672.09 352.107,672.147 ; R24.2@375.412,672.147 373.19,674.37 367.347,674.37 365.125,672.147 352.107,672.147
SUTUN_4: DISP1.2 LD4.1 LD14.1 R5.2 TP60.1 | length 142.5
  Top Layer, Top w0.305: LD4.1@261.95,659 LD4.1@262.05,659 262.05,659.765 265.542,663.257 285.115,663.257 287.655,665.798 287.655,670.56 291.465,674.37 314.487,674.37 315.44,673.418 DISP1.2@315.44,671.38 315.44,668.81 316.548,667.702 328.613,667.702 335.28,674.37 343.535,674.37 350.202,667.702 350.202,664.845 350.837,664.21 352.107,664.21 ; LD14.1@351.95,659 LD14.1@352.05,659 352.05,664.152 352.107,664.21 ; TP60.1@373.38,664.21 352.107,664.21
  Top Layer, Top w0.635: TP60.1@373.38,664.21 R5.2@375.412,664.21
SUTUN_5: DISP1.1 J8.1 J8.2 LD5.1 LD15.1 R36.2 TP58.1 | length 159.4
  Top Layer, Top w0.305: LD5.1@261.95,651 LD5.1@262.05,651 262.05,652.145 268.717,658.812 281.94,658.812 288.29,665.163 288.29,670.242 291.782,673.735 311.15,673.735 312.9,671.985 DISP1.1@312.9,671.38 312.9,668.81 314.642,667.067 328.93,667.067 335.597,673.735 343.217,673.735 349.567,667.385 349.567,655.637 350.202,655.002 J8.1@359.092,655.002 ; LD15.1@351.95,651 LD15.1@352.05,651 352.05,652.087 352.425,652.462 360.68,652.462 361.632,653.415 J8.2@361.632,655.002 362.902,656.272 TP58.1@373.38,656.272
  Top Layer, Top w0.635: TP58.1@373.38,656.272 R36.2@375.412,656.272
SUTUN_6: DISP1.10 LD6.1 LD16.1 R17.2 TP56.1 | length 128.7
  Top Layer, Top w0.305: LD6.1@284.45,683 LD6.1@284.55,683 284.55,680.968 287.972,677.545 294.005,677.545 294.957,678.497 294.957,681.673 296.545,683.26 317.183,683.26 317.98,684.057 DISP1.10@317.98,686.62 317.98,688.82 318.77,689.61 329.248,689.61 334.962,683.895 338.137,683.895 340.678,681.355 340.678,678.497 341.63,677.545 345.123,677.545 348.615,674.053 359.727,674.053 ; R17.2@375.412,685.8 375.412,683.127 375.285,683 ; LD16.1@383.05,683 375.285,683 ; 359.728,674.053 360.045,674.053 ; 359.727,674.053 360.045,674.053 ; 360.045,674.053 360.363,674.053 369.31,683 375.285,683
  Top Layer, Top w0.635: TP56.1@373.38,685.8 R17.2@375.412,685.8
SUTUN_7: DISP1.5 LD7.1 LD17.1 R16.2 TP54.1 | length 113.6
  Top Layer, Top w0.305: LD7.1@284.45,675 LD7.1@284.55,675 284.48,674.93 284.48,673.735 284.798,673.418 287.337,673.418 290.195,676.275 322.897,676.275 ; 323.06,674.929 323.06,676.113 322.897,676.275 ; R16.2@375.412,677.862 375.412,675.132 375.285,675.005 375.29,675 ; LD17.1@383.05,675 375.29,675 ; 322.897,676.275 323.215,676.275 344.48,676.283 347.98,672.783 364.49,672.783 366.707,675 375.29,675
  Top Layer, Top w0.635: TP54.1@373.38,677.862 R16.2@375.412,677.862
  Top Layer, Top w1.016: DISP1.5@323.06,671.38 323.06,674.929
SUTUN_8: DISP1.3 LD8.1 LD18.1 R12.2 TP52.1 | length 120.1
  Top Layer, Top w0.305: LD8.1@284.45,667 LD8.1@284.55,667 284.55,668.337 291.217,675.005 316.71,675.005 317.98,673.735 DISP1.3@317.98,671.38 317.98,669.128 318.77,668.337 328.295,668.337 334.962,675.005 343.852,675.005 350.837,668.02 350.837,665.48 351.472,664.845 371.475,664.845 TP52.1@373.38,666.75 373.63,667 375.412,667 ; R12.2@375.412,669.607 375.412,667 ; LD18.1@383.05,667 375.412,667
SUTUN_9: LD9.1 LD19.1 R3.2 TP50.1 | length 137.6
  Top Layer, Top w0.305: LD9.1@284.45,659 LD9.1@284.55,659 284.55,660.152 288.925,664.527 288.925,669.925 292.1,673.1 307.022,673.1 313.69,666.433 329.248,666.433 335.915,673.1 342.9,673.1 348.933,667.067 348.933,655.002 350.52,653.415 360.045,653.415 360.363,653.732 360.363,656.272 363.09,659 375.415,659 ; R3.2@375.412,661.67 375.412,659.257 375.285,659.13 375.415,659 ; LD19.1@383.05,659 375.415,659
  Top Layer, Top w0.635: TP50.1@373.38,661.67 R3.2@375.412,661.67
SUTUN_10: LD10.1 LD20.1 R15.2 TP48.1 | length 147.6
  Top Layer, Top w0.305: LD10.1@284.45,651 LD10.1@284.55,651 284.55,652.532 289.56,657.543 289.56,669.607 292.417,672.465 306.705,672.465 313.373,665.798 329.565,665.798 336.232,672.465 342.582,672.465 348.298,666.75 348.298,649.605 349.25,648.652 374.65,648.652 375.412,649.414 375.412,651 ; R15.2@375.412,653.732 375.412,651 ; LD20.1@383.05,651 375.412,651
  Top Layer, Top w0.635: TP48.1@373.38,653.732 R15.2@375.412,653.732
TACHO: C31.1 R53.2 TP95.1 U5.9 | length 11.5
  Top Layer, Top w0.292: TP95.1@230.188,642.938 230.188,642.366 230.569,641.985 233.26,641.985 ; R53.2@233.26,641.033 233.26,641.985 ; C31.1@233.26,642.938 233.26,641.985
  Top Layer, Top w0.305: C31.1@233.26,642.938 233.895,643.572 238.71,643.572 U5.9@238.76,643.523
TACHO_K2: KN8.1 R68.2 R69.1 TP99.1 | length 14.9
  Top Layer, Top w1.016: R68.2@173.355,668.972 TP99.1@173.355,671.195 173.355,675.64 ; R69.1@173.355,680.72 173.355,675.64 ; KN8.1@176.53,675.64 173.355,675.64
TAHLIYE_POMPASI: KN3.4 R129.1 T3.2 T3.4 TP146.1 | length 16.8
  Top Layer, Top w0.508: R129.1@223.139,668.02 223.139,669.544 224.287,670.692 226.562,670.692 227.515,671.645 KN3.4@227.515,674.053
  Top Layer, Top w1.016: T3.4@224.472,680.353 224.522,680.353 TP146.1@227.33,677.545 227.515,677.36 KN3.4@227.515,674.053
TX: KN4.3 R88.2 TP163.1 U5.3 | length 35.4
  Top Layer, Top w0.292: KN4.3@222.012,655.002 222.012,653.335 222.821,652.526 230.886,652.526 232.855,650.558 233.362,650.558 ; TP163.1@222.885,656.59 223.52,657.225 227.965,657.225
  Top Layer, Top w0.305: 227.965,657.225 229.235,657.225 231.14,655.32 231.775,655.32 232.41,654.685 R88.2@233.782,654.685 ; 233.362,650.558 236.22,650.558 236.537,650.24 236.537,648.97 237.185,648.323 U5.3@238.76,648.323
  Top Layer, Top w0.508: KN4.3@222.012,655.002 222.012,655.717 TP163.1@222.885,656.59
VALVE_1_PREWASH/JTAG_TDI: R61.1 TP1.1 U5.54 | length 24.3
  Top Layer, Top w0.305: U5.54@248.86,652.023 248.86,653.419 253.301,657.86 TP1.1@254.317,657.86 257.175,660.717 257.175,670.56 256.349,671.385 R61.1@256.349,671.957
VALVE_2_MAINWASH: R73.1 TP161.1 U5.49 | length 38.3
  Top Layer, Top w0.292: U5.49@252.86,652.023 254.195,652.023 256.222,654.05 256.222,657.225
  Top Layer, Top w0.305: 256.222,657.225 TP161.1@257.493,658.495 258.445,659.447 258.445,685.482 258.762,685.8 R73.1@258.762,687.07
VALVE_3_HOT/JTAG_TDO: R91.1 TP2.1 U5.55 | length 25.6
  Top Layer, Top w0.305: U5.55@248.06,652.023 248.06,653.507 253.682,659.13 254.635,659.13 255.905,660.4 TP2.1@255.905,661.352 255.905,661.987 256.54,662.622 256.54,670.179 255.905,670.814 255.016,670.814 R91.1@253.873,671.957
WATER_LEVEL: C16.1 C17.1 J19.1 J19.2 J40.1 J40.2 R40.1 R42.2 TP156.1 U5.31 | length 28.8
  Top Layer, Top w0.292: U5.31@252.06,635.823 252.06,632.178 252.412,631.825 254.317,631.825 254.635,631.507 254.635,629.285 255.905,628.015 J19.1@258.127,628.015
  Top Layer, Top w0.508: J19.2@261.303,628.015 C17.1@261.303,625.158 261.303,623.887 261.62,623.57 J40.2@261.62,622.3 ; J40.1@261.62,619.125 265.239,619.125 R40.1@265.557,619.442 C16.1@265.557,617.22 R42.2@265.557,614.997 TP156.1@263.842,614.997
ZEROCROSS/DOORLOCK_CHECK: C30.1 R96.2 TP114.1 U5.6 | length 10.2
  Top Layer, Top w0.305: C30.1@233.26,644.842 233.26,645.795 233.045,646.01 R96.2@233.045,647.167 233.895,648.017 236.537,648.017 236.918,647.636 TP114.1@236.918,646.747 236.918,646.112 237.109,645.922 U5.6@238.76,645.923
~ROTOR: JM2.2 KN1.4 KN9.2 TP94.1 | length 40.7
  Top Layer, Top w1.016: 119.328,675.64 119.328,679.715 122.872,683.26 TP94.1@127.317,683.26 144.78,683.26 JM2.2@147.637,680.402 149.842,678.198 149.842,675.64
pads on no net: DISP1.13 DISP1.14 F1.1 F2.1 F4.1 KN5.5 RL3.4 RS1.10@161.5,634.9 RS1.11 RS1.12 RS1.13 U3.1 U3.2 U3.3 U3.4 U3.5 U3.6 U5.1 U5.4 U5.5 U5.7 U5.8 U5.51
copper on no net: | length 2.2
  Top Layer, Top w0.305: 235.267,646.747 235.267,645.477 235.903,644.842